# Altium PCB TCRT5000_Sensors.PcbDoc
Units mm, origin at the board's own origin, x right, y up, seen from the top; angles counter-clockwise.
Board outline 94.85 x 49.85 mm, 2 copper layers (Top Layer, Bottom Layer); 21 components, 12 nets, 76 pads, 9 vias.
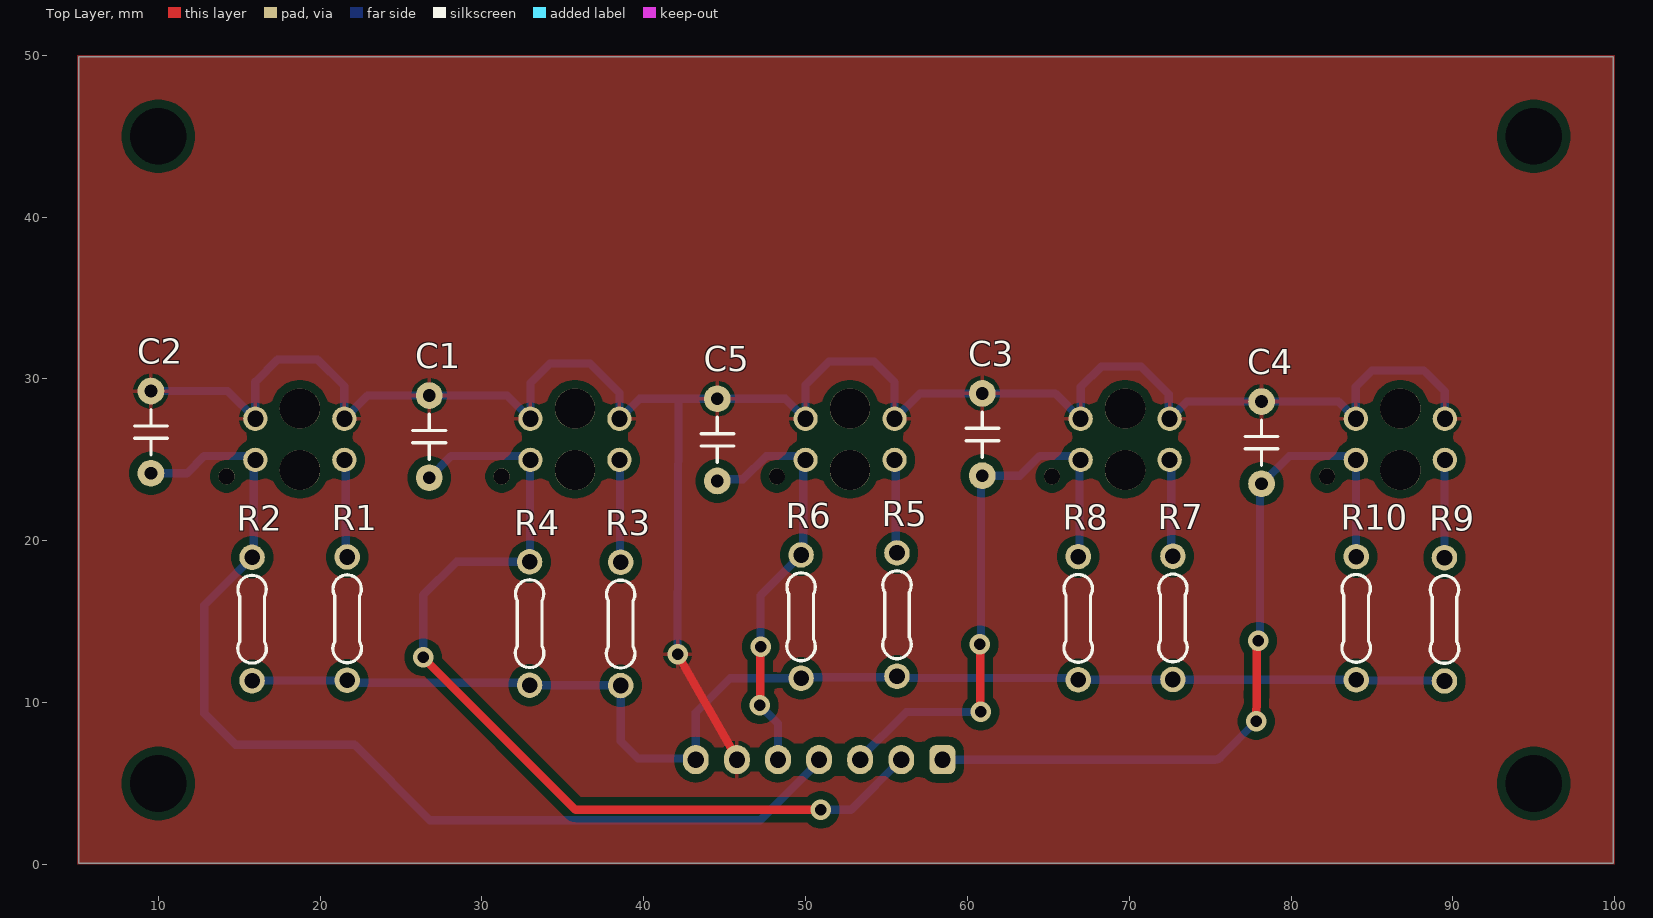
[diagram p0: Top Layer view]
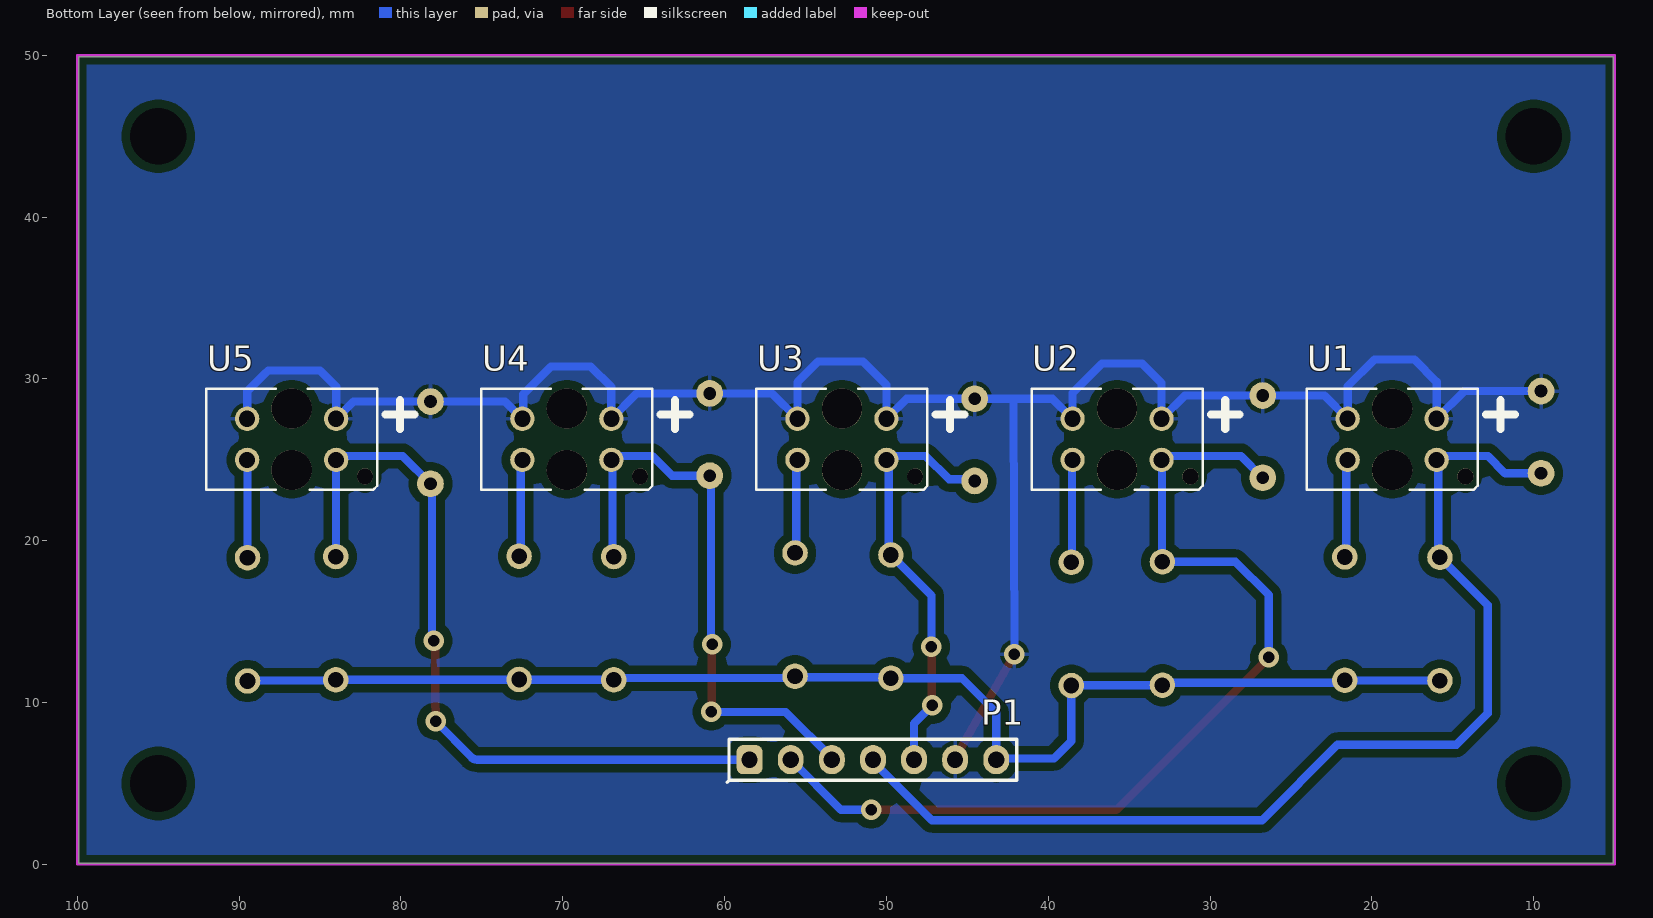
[diagram p1: Bottom Layer view, seen from below]
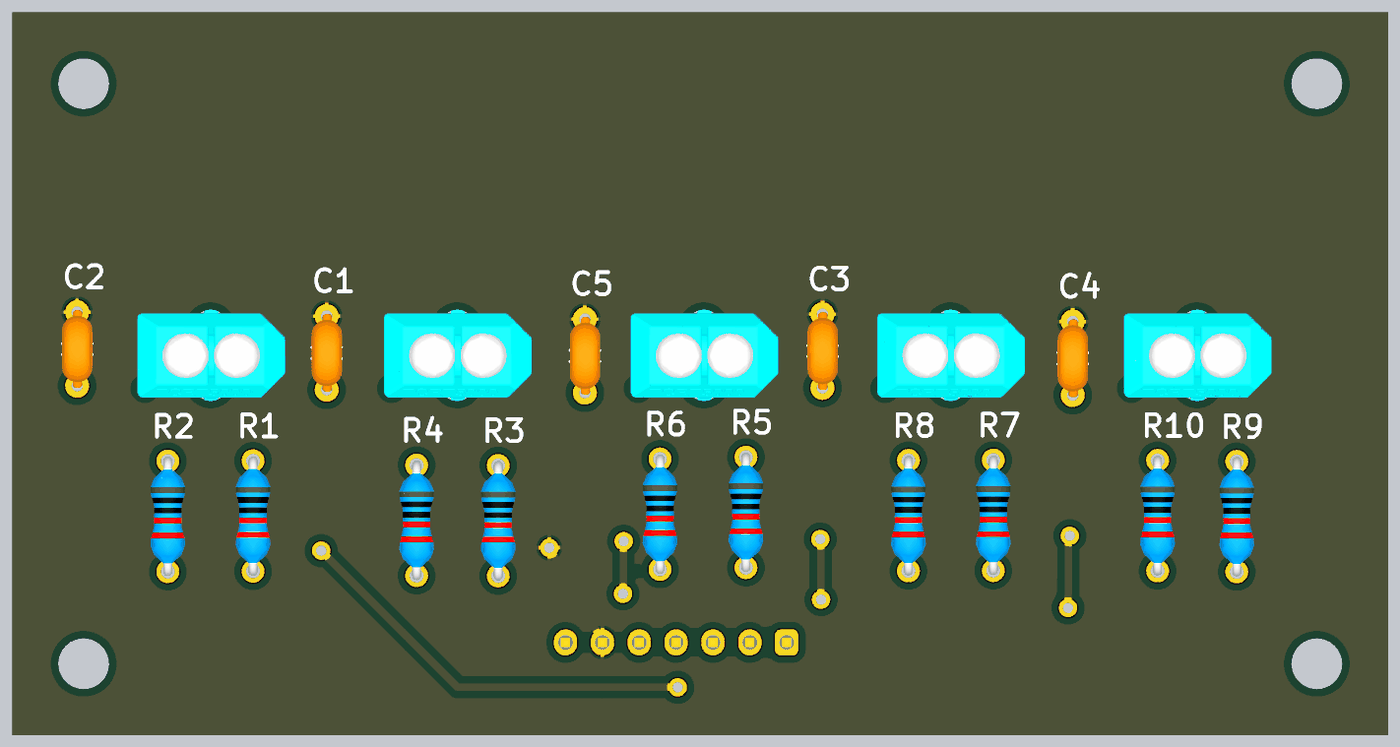
[diagram p2: 3D render of the assembled board from above, using the file's embedded part models]
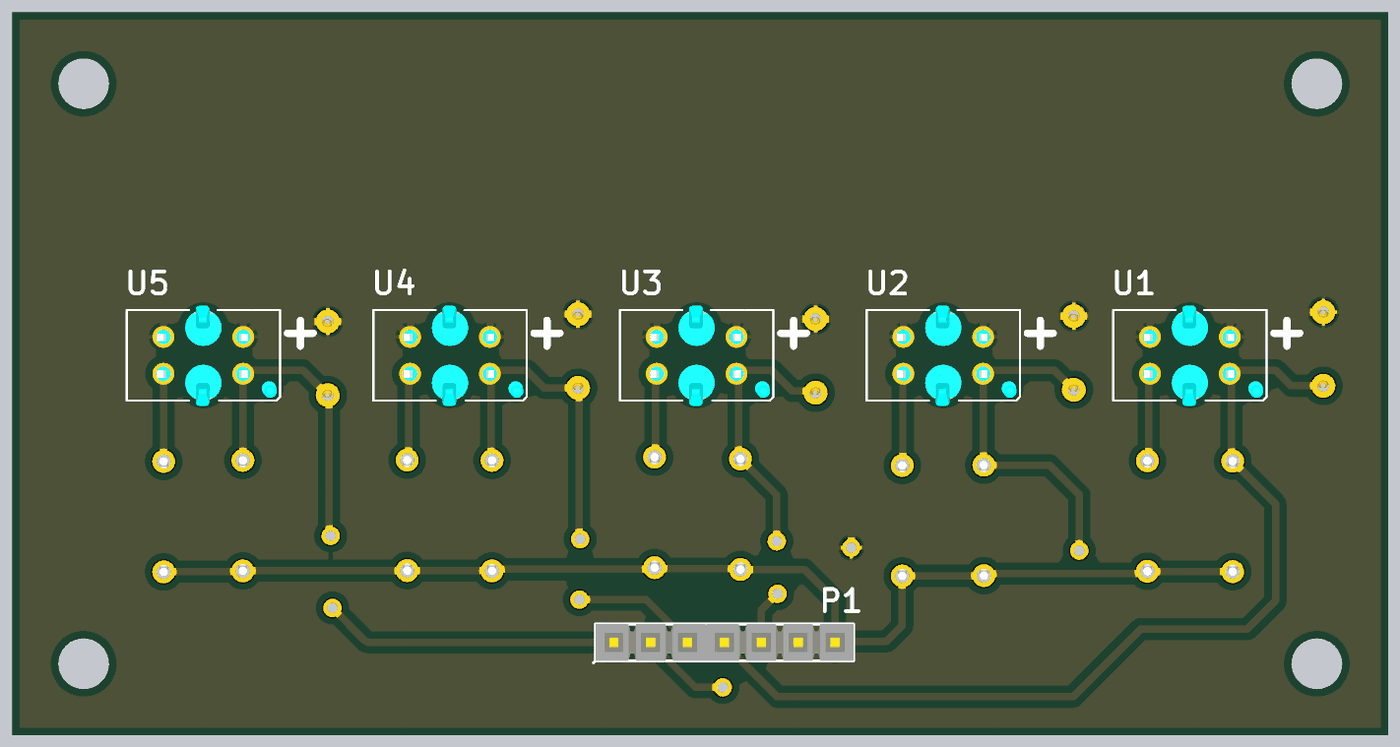
[diagram p3: 3D render of the assembled board from below, using the file's embedded part models]

## Layer stack, top to bottom
Top Solder: solder mask 0.0102, Solder Resist, Dk 3.5
Top Layer: signal copper 0.0356
Dielectric 1: dielectric 0.32, FR-4, Dk 4.8
Bottom Layer: signal copper 0.0356
Bottom Solder: solder mask 0.0102, Solder Resist, Dk 3.5

## Board outline
5.075,0.075 99.925,0.075 99.925,49.925 5.075,49.925

## Design rules (kind name [scope] priority, off if disabled: settings)
Clearance [All] p1: gap=0.508 ignorepadtopadclearanceinfootprint=FALSE
PolygonConnect [All] p1: connectstyle=Relief reliefconductorwidth=0.254 reliefentries=4 polygonreliefangle="90 Angle" airgapwidth=0.254
RoutingVias [All] p1: holewidth=0.711 width=1.27 viastyle="Through Hole" minholewidth=0.711 minwidth=1.27 maxholewidth=0.711 maxwidth=1.27
SolderMaskExpansion [All] p1: expansion=0.102 istentingtop=FALSE
SupplyNets "Schematic Supply Nets_1" [InNet('+3.3')] p1: voltage=0.000
SupplyNets "Schematic Supply Nets" [InNet('GND')] p2: voltage=0.000
Width [All] p1: maxlimit=2.54 minlimit=0.508 preferedwidth=1.016
30 further rules are at their usual default settings.

## Components (designator, comment, footprint, x,y, rotation, side; value= is the part's Value field where it differs from the comment)
C1 "104" "CAP Ceramic/W200" 26.75,23.895 r90 top
C2 "104" "CAP Ceramic/W200" 9.55,24.17 r90 top
C3 "104" "CAP Ceramic/W200" 60.925,24.025 r90 top
C4 "104" "CAP Ceramic/W200" 78.175,23.525 r90 top
C5 "104" "CAP Ceramic/W200" 44.55,23.695 r90 top
P1 "Header 7" HDR/Header/7 50.835,6.475 r180 bottom
R1 "220" "R 1/4W/300" 21.675,19 r270 top
R2 "3.3k" "R 1/4W/300" 15.8,18.975 r270 top
R3 "220" "R 1/4W/300" 38.575,18.675 r270 top
R4 "3.3k" "R 1/4W/300" 32.95,18.7 r270 top
R5 "220" "R 1/4W/300" 55.65,19.25 r270 top
R6 "3.3k" "R 1/4W/300" 49.725,19.125 r270 top
R7 "220" "R 1/4W/300" 72.7,19.05 r270 top
R8 "3.3k" "R 1/4W/300" 66.85,19.025 r270 top
R9 "220" "R 1/4W/300" 89.481,18.956 r270 top
R10 "3.3k" "R 1/4W/300" 84.025,19.025 r270 top
U1 "TCRT5000" TCRT5000 16,25 r0 bottom
U2 "TCRT5000" TCRT5000 33,25 r0 bottom
U3 "TCRT5000" TCRT5000 50,25 r0 bottom
U4 "TCRT5000" TCRT5000 67,25 r0 bottom
U5 "TCRT5000" TCRT5000 84,25 r0 bottom

## Footprints (in the part's own frame and the unit in brackets; to place one, negate y for a bottom-side part, rotate by r counter-clockwise, add the part's x,y. Pads: shape width x height; smd on the part's side, far side on the other; paste and mask are expansions set on the pad)
"CAP Ceramic/W200" [mil]
  round 65 hole 31: 1(0,0) 2(200,0)
  silkscreen extent 45,-40 155,40, body extent -6,-42 206,41, height 181
HDR/Header/7 [mm]
  rrect50% 1.6x1.8 hole 1: 1(-7.62,0)
  oval 1.6x1.8 hole 1: 2(-5.08,0) 3(-2.54,0) 4(0,0) 5(2.54,0) 6(5.08,0) 7(7.62,0)
  silkscreen extent -9.02,-1.4 8.89,1.27, body extent -8.89,-1.27 8.89,1.27, height 8.89
"R 1/4W/300" [mil] "Through hole resitor, axial 300mils, 1/4W"
  round 62 hole 38: 1(0,0) 2(300,0)
  silkscreen extent 44,-35 257,35, body extent -12,-47 312,47, height 97
TCRT5000 [mil]
  round 59 / inner round 60 / far side round 59 hole 39 paste-99999 mask+0: 1(0,0) 2(0,-100) 3(216.54,0) 4(216.54,-100)
  round 98 / inner round 60 / far side round 98 hole 98 unplated paste-99999 mask+0: 5(108.27,24.8) 6(108.27,-124.8)
  round 39 / inner round 60 / far side round 39 hole 39 unplated paste-99999 mask+0: 7(-70,40)
  silkscreen extent -190,-173 316,73, body extent -91,-185 311,87, height 102

## Part data
C1 C2 C3 C4 C5: library part "Capacitor NP", "Capacitor non-pol"
P1: "Header, 7-Pin"
R1 R2 R3 R4 R5 R6 R7 R8 R9 R10: library part Resistor, "Resistor"
U1 U2 U3 U4 U5: "SENSOR REFL, LENSES, CONVER. AXES-e2", Manufacturer_Name=Vishay, Copyright="Copyright (C) 2025 Ultra Librarian. All rights reserved.", Manufacturer_Part_Number=TCRT5000, RefDes=RefDes, TYPE=Type

## Free pads (board coordinates)
  rrect10% 0x0 / inner rrect10% 1.6x0.3 / far side rrect10% 1.6x0.3 hole 3.5 unplated mask+0.07: 8(10,5) 8(10,45) 8(95,5) 8(95,45)

## Via types
v1: diameter 1.27, hole 0.711, Top Layer to Bottom Layer, 9 vias

## Nets (pads, with @x,y where several pads share a name; then routed paths per layer and width w, separated by ;. In a path a pad name is that pad's centre, name@x,y a point inside that pad or via, vN(x,y) a via of type N, cw(c..) or ccw(c..) an arc to the next point about the centre after c; other vN are vias at no path point)
+3.3: P1.7 R1.2 R2.2 R3.2 R4.2 R5.2 R6.2 R7.2 R8.2 R9.2 R10.2 | length 81.7
  Bottom Layer w0.508: R2.2 15.813,11.368 21.663,11.368 R1.2 21.825,11.23 32.8,11.23 R4.2 32.962,11.068 38.562,11.068 R3.2 38.575,7.625 39.65,6.55 43.14,6.55 P1.7 43.215,9.39 45.33,11.505 R6.2 49.788,11.568 55.588,11.568 R5.2 55.762,11.518 66.737,11.518 R8.2 66.863,11.418 72.688,11.418 R7.2 72.712,11.418 84.012,11.418 R10.2 84.059,11.371 89.447,11.371 R9.2
AN1: C5.1 P1.5 R6.1 U3.1 | length 26.3
  Top Layer w0.508: v1(47.175,9.825) 47.2,9.85 47.2,13.425 v1(47.225,13.45)
  Bottom Layer w0.508: C5.1 44.66,23.805 46.137,23.805 47.574,25.241 49.491,25.241 49.732,25 U3.1 49.863,24.863 49.863,19.263 R6.1 47.225,16.625 v1(47.225,13.45) ; v1(47.175,9.825) 48.295,8.705 P1.5
AN2: C2.1 P1.4 R2.1 U1.1 | length 66.3
  Bottom Layer w0.508: C2.1 11.765,24.17 12.837,25.241 15.491,25.241 15.732,25 U1.1 15.9,24.9 15.9,19.075 R2.1 12.85,16.025 12.85,9.325 14.775,7.4 22.125,7.4 26.8,2.725 47.185,2.725 50.835,6.375 P1.4
AN3: C3.1 P1.3 R8.1 U4.1 | length 36.1
  Top Layer w0.508: v1(60.775,13.6) 60.8,13.575 60.8,9.45 v1(60.825,9.425)
  Bottom Layer w0.508: P1.3 53.375,6.575 56.225,9.425 v1(60.825,9.425) ; v1(60.775,13.6) 60.85,13.675 60.85,23.95 C3.1 63.254,24.025 64.471,25.241 66.491,25.241 66.732,25 U4.1 66.925,24.925 66.925,19.1 R8.1
AN4: C1.1 P1.2 R4.1 U2.1 | length 59.2
  Top Layer w0.508: v1(26.375,12.8) 35.798,3.377 v1(50.949,3.377)
  Bottom Layer w0.508: v1(26.375,12.8) 26.375,16.65 28.425,18.7 R4.1 32.975,18.725 32.975,24.975 U2.1 32.732,25 32.491,25.241 28.096,25.241 C1.1 ; v1(50.949,3.377) 52.817,3.377 P1.2
AN5: C4.1 P1.1 R10.1 U5.1 | length 47.8
  Top Layer w0.508: v1(77.85,8.85) 77.875,10.493 ccw(c77.367,10.501) 77.875,10.501 77.875,13.725 v1(77.975,13.825)
  Bottom Layer w0.508: P1.1 75.288,6.475 ccw(c75.288,6.983) 75.649,6.626 v1(77.85,8.85) ; v1(77.975,13.825) 78.075,13.925 78.075,23.425 C4.1 79.891,25.241 83.491,25.241 83.732,25 U5.1 84.012,24.988 84.012,19.038 R10.1
GND: C1.2 C2.2 C3.2 C4.2 C5.2 P1.6 U1.2 U1.4 U2.2 U2.4 U3.2 U3.4 U4.2 U4.4 U5.2 U5.4 | length 133.7
  Top Layer w0.508: v1(42.092,12.998) 45.755,6.575 P1.6
  Bottom Layer w0.508: C2.2 14.29,29.25 U1.2 16,29.825 17.375,31.2 19.85,31.2 21.5,29.55 U1.4 22.935,28.975 C1.2 31.565,28.975 U2.2 33,29.75 34.2,30.95 36.675,30.95 38.5,29.125 U2.4 39.735,28.775 42.142,28.775 ; v1(42.092,12.998) 42.142,28.775 ; U5.4 89.5,29.225 88.399,30.326 88.2,30.525 85,30.525 84,29.525 U5.2 83.993,27.54 82.928,28.605 C4.2 73.572,28.605 72.507,27.54 U4.4 72.449,27.591 72.449,29.051 70.725,30.775 68.275,30.775 67,29.5 U4.2 65.435,29.105 C3.2 57.065,29.105 U3.4 55.5,29.8 54.225,31.075 51.45,31.075 50,29.625 U3.2 48.765,28.775 C5.2 42.142,28.775
NetR1_1: R1.1 U1.3 | length 6.1
  Bottom Layer w0.508: U1.3 21.588,24.913 21.588,19.088 R1.1
NetR3_1: R3.1 U2.3 | length 6.4
  Bottom Layer w0.508: U2.3 38.537,24.963 38.537,18.713 R3.1
NetR5_1: R5.1 U3.3 | length 5.8
  Bottom Layer w0.508: U3.3 55.575,24.925 55.575,19.325 R5.1
NetR7_1: R7.1 U4.3 | length 6
  Bottom Layer w0.508: U4.3 72.6,24.9 72.6,19.15 R7.1
NetR9_1: R9.1 U5.3 | length 6.1
  Bottom Layer w0.508: R9.1 89.491,18.966 89.491,24.991 U5.3
pads on no net: U1.5 U1.6 U1.7 U2.5 U2.6 U2.7 U3.5 U3.6 U3.7 U4.5 U4.6 U4.7 U5.5 U5.6 U5.7

## Polygon pours and split planes (outlines as drawn)
GND on Bottom Layer "GND_L02_P000" (solid, remove dead copper, pour order 0): 5,50 100,50 100,0 5,0
GND on Top Layer "GND_L01_P002" (solid, remove dead copper, pour order 2): 5,50 100,50 100,0 5,0

## Keep-outs
Bottom Layer:
  lines w0.15: 5,0 5,50 100,50 ; 5,0 100,0 ; 5,0 100,0 ; 100,0 100,50 ; 100,0 100,50